# Altium PCB CT310高端控制盒基板电路V1.0.PcbDoc (part 2 of 8)
Units mil, origin at the board's own origin, x right, y up, seen from the top; angles counter-clockwise.
Board outline 8162.61 x 6196.81 mil, 2 copper layers (Top Layer, Bottom Layer), stack 65.792 mil thick; 265 components, 178 nets, 926 pads, 298 vias.
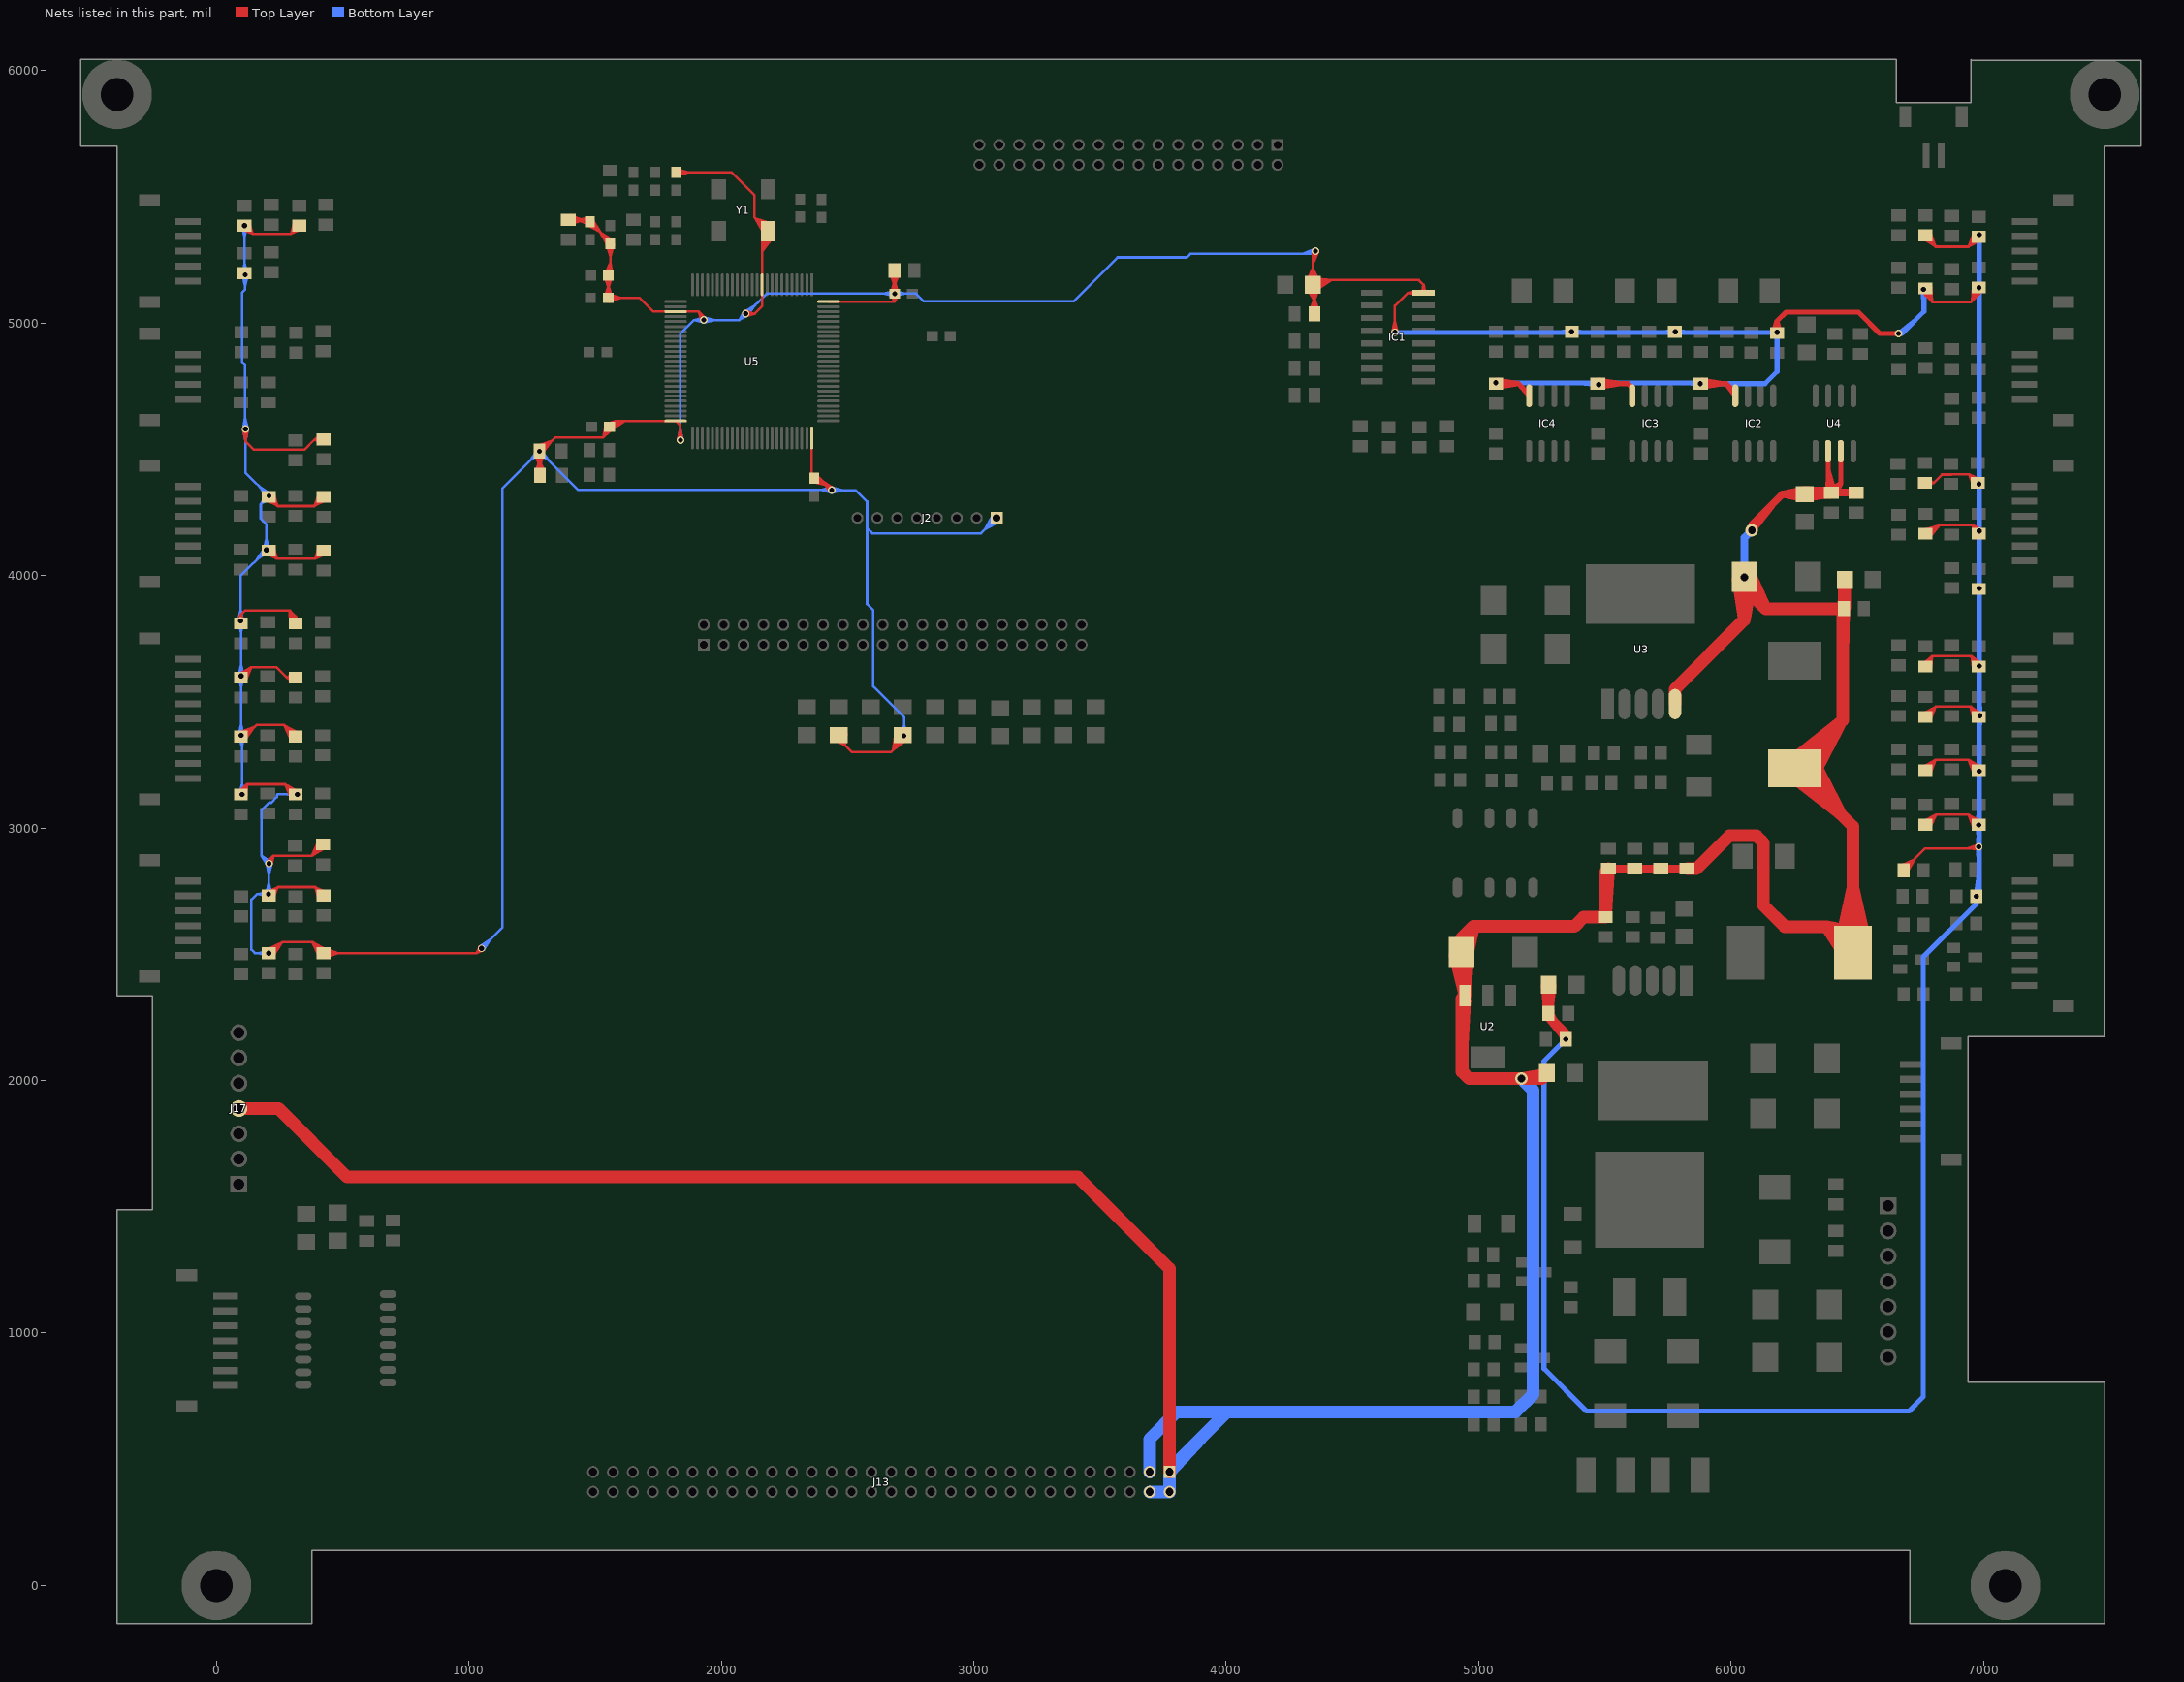
[diagram p2: the nets of this part, all layers, seen from the top]

## Via types
v1: diameter 30, hole 20, Top Layer to Bottom Layer, tented both sides, 226 vias
v2: diameter 60, hole 30, Top Layer to Bottom Layer, tented both sides, 32 vias
v3: diameter 50, hole 30, Top Layer to Bottom Layer, tented both sides, 20 vias
v4: diameter 80, hole 50, Top Layer to Bottom Layer, tented both sides, 10 vias
v5: diameter 50, hole 28, Top Layer to Bottom Layer, tented both sides, 8 vias
v6: diameter 24, hole 16, Top Layer to Bottom Layer, tented both sides, 1 vias
v7: diameter 30, hole 16, Top Layer to Bottom Layer, tented both sides, 1 vias

## Nets (pads, with @x,y where several pads share a name; then routed paths per layer and width w, separated by ;. In a path a pad name is that pad's centre, name@x,y a point inside that pad or via, vN(x,y) a via of type N, cw(c..) or ccw(c..) an arc to the next point about the centre after c; other vN are vias at no path point) (continued)
+3.3V_S: C6.1 C9.2 C92.2 C93.2 C95.2 C96.1 C97.1 C98.1 C100.1 C102.1 C104.1 C108.1 C112.2 C113.2 C114.2 C115.2 D60.1 D61.1 IC1.16 IC2.8 IC3.8 IC4.8 J2.1 L1.1 L4.1 R13.2 R14.2 R15.2 R16.2 R17.2 R23.2 R24.2 R25.2 R26.2 R31.2 R32.2 R33.2 R34.2 R39.2 R40.2 R41.2 R42.2 R45.1 R47.2 R48.2 R49.2 R50.2 R53.1 R55.2 R56.2 R59.2 R60.2 R61.2 R65.2 R66.2 R67.2 R71.2 R72.2 R73.2 R77.2 R78.2 R79.2 R85.2 R86.2 R89.2 R90.2 R93.2 R109.1 R112.1 R115.1 U5.11 U5.28 U5.50 U5.75 U5.100 Y1.4 | length 81028.4
  Top Layer w10: R50.2@88.74,3811.8 97.3,3845.3 ; R34.2@89.74,3610.38 137.85,3636.29 ; R50.2@90.81,3828.55 R50.2@79.36,3815.75 ; R34.2@92.26,3610.19 135.72,3634.57 ; R49.2@92.39,3379.05 151.24,3400.24 ; R49.2@93.08,3375.38 140.2,3396.26 ; R49.2@93.42,3375.56 138.16,3392.99 ; R33.2@93.72,3126.59 R33.2@86.58,3144.16 ; R49.2@93.79,3375.74 139.51,3391.43 ; R33.2@93.9,3137.2 121.22,3173.22 ; R49.2@93.9,3375.79 143.65,3392.65 ; R49.2@93.96,3375.82 142.98,3392.03 ; R34.2@95.31,3601.99 137.85,3636.29 ; R50.2@95.55,3810.01 R50.2@79.36,3815.75 ; R50.2@96.39,3810.01 R50.2@115.23,3815.75 ; R49.2@96.54,3369.9 151.24,3400.24 ; R50.2@97.3,3810.73 97.3,3845.3 ; R50.2@97.3,3820 97.3,3845.3 ; R49.2@98.64,3356.69 R49.2@113.67,3362.67 ; R50.2@100.57,3828.9 R50.2@115.23,3815.75 ; R34.2@100.78,3599.22 137.85,3636.29 ; R33.2@101.23,3132.67 121.22,3173.22 ; R49.2@101.23,3362.67 151.24,3400.24 ; R34.2@101.23,3595.73 137.85,3636.29 ; R33.2@101.88,3122.67 R33.2@119.27,3128.05 ; R49.2@103.35,3375.12 R49.2@113.67,3362.67 ; R49.2@103.73,3358.47 142.98,3392.03 ; R49.2@103.75,3358.49 143.65,3392.65 ; R49.2@103.98,3358.66 139.51,3391.43 ; R77.2@104.18,5371 144.28,5353 ; R49.2@104.32,3358.92 138.16,3392.99 ; R49.2@104.51,3359.08 140.2,3396.26 ; v1@105.06,4578.89 115,4535 v1@124.94,4578.89 ; R34.2@105.2,3595.06 136.42,3634.69 ; R34.2@105.25,3595.11 137.02,3635.84 ; R34.2@105.26,3595.12 135.72,3634.57 ; R33.2@105.42,3141.94 R33.2@86.58,3144.16 ; R50.2@105.85,3811.8 97.3,3845.3 ; R33.2@106.76,3141.27 R33.2@119.27,3128.05 ; R49.2@106.87,3356.15 151.24,3400.24 ; R34.2@108.07,3590.47 137.85,3636.29 ; R33.2@109.29,3129.61 121.22,3173.22 ; R77.2@109.35,5379.68 144.28,5353 ; R49.2@114.51,3349.61 151.24,3400.24 ; v1(115,4580) 115,4533 149.52,4498.48 348.89,4498.48 389.44,4539.04 ; R77.2@115.23,5385.99 144.28,5353 ; R34.2@116.98,3585.79 137.85,3636.29 ; R77.2@122.23,5391.02 144.28,5353 ; R77.2@131.5,5395.06 144.28,5353 ; R61.2@188.93,4096.79 R61.2@200.53,4083.66 ; R61.2@192.27,4092.8 237.81,4067.1 ; R61.2@192.4,4092.72 236.1,4069.19 ; R14.2@197.64,2503.63 R14.2@201.48,2520.01 ; R73.2@198.13,4316.6 R73.2@200.02,4297.04 ; R16.2@200.94,2748.15 243,2766 ; v1@201,2865 226,2890 ; R14.2@201.57,2512.31 246.95,2540.5 ; R14.2@201.87,2512.54 245.67,2537.16 ; R14.2@202.25,2512.79 246.46,2534.98 ; R14.2@202.39,2512.87 248,2535 ; R14.2@202.5,2512.94 249.67,2535.24 ; R61.2@205.02,4108.12 238.09,4068.49 ; R61.2@205.05,4108.09 236.91,4069.37 ; R61.2@205.18,4107.96 237.81,4067.1 ; R61.2@205.15,4107.99 236.1,4069.19 ; R73.2@205.54,4305.49 243,4275 ; R61.2@205.68,4092.36 240.28,4066 ; R16.2@205.89,2739.35 243,2766 ; R14.2@206.33,2511.21 258.88,2545.88 ; R61.2@207.62,4098.67 240.28,4066 ; R73.2@207.62,4310.38 243,4275 ; R61.2@207.9,4099.56 R61.2@200.53,4083.66 ; R16.2@211,2734 243,2766 ; R14.2@211.56,2504.35 258.88,2545.88 ; R16.2@211.56,2732.85 243,2766 ; R61.2@211.55,4098.67 240.28,4066 ; R73.2@211.55,4311.67 243,4275 ; R14.2@214.28,2496.9 249.67,2535.24 ; R14.2@214.42,2497.02 248,2535 ; R14.2@214.57,2497.17 246.46,2534.98 ; R14.2@214.87,2497.47 245.67,2537.16 ; R14.2@215.05,2497.65 246.95,2540.5 ; R14.2@215.42,2510.6 R14.2@201.48,2520.01 ; R73.2@215.8,4308.75 R73.2@200.02,4297.04 ; R73.2@216.1,4320.87 242.27,4276.24 ; R73.2@216.14,4320.8 240.91,4277.44 ; R73.2@216.11,4320.85 243,4275 ; R73.2@216.17,4320.77 240.88,4277.12 ; R73.2@216.16,4320.77 241.62,4276.12 ; R14.2@217.35,2504.35 261,2548 380.62,2548 ; R14.2@217.67,2498.28 258.88,2545.88 ; R16.2@218.34,2727.53 243,2766 ; v1@218.36,2855.48 226,2890 ; R61.2@218.56,4103.69 240.28,4066 ; R73.2@218.57,4316.67 243,4275 ; R14.2@225.77,2492.32 258.88,2545.88 ; R16.2@227.39,2723.06 243,2766 ; R73.2@227.76,4320.84 243,4275 ; R61.2@227.85,4107.69 240.28,4066 ; 279.04,4066 240.28,4066 ; 279.06,4065.98 391.58,4065.98 ; R42.2@291.76,3806.99 290,3862 ; R25.2@294.26,3122.72 273.38,3173.22 ; R41.2@294.48,3352.37 269.11,3407.5 ; R42.2@301.75,3808.23 290,3862 ; R41.2@303.24,3357.32 269.11,3407.5 ; R26.2@304.39,3577.97 279.12,3595.73 ; R26.2@304.39,3613.48 279.12,3595.73 ; R71.2@307.74,5395.06 294.95,5353 ; R26.2@308.8,3587.19 279.12,3595.73 ; R26.2@308.8,3604.27 279.12,3595.73 ; R25.2@310.01,3132.67 273.38,3173.22 ; R41.2@310.01,3362.67 269.11,3407.5 ; R26.2@310.01,3595.73 279.12,3595.73 ; R42.2@310.01,3810.73 290,3862 ; R25.2@313.62,3126.25 281.36,3168.93 ; R25.2@313.77,3126.09 283.23,3165.29 ; R25.2@313.94,3132.67 273.38,3173.22 ; R41.2@313.94,3362.67 268.61,3408 159,3408 R49.2@113.67,3362.67 ; R26.2@313.94,3595.73 279.12,3595.73 ; R25.2@313.96,3125.9 281.95,3164.65 ; R25.2@314.04,3125.82 280.78,3165.03 ; R25.2@314.18,3125.68 277.84,3166.37 ; R25.2@315.56,3141.39 R25.2@303.17,3127.41 ; R25.2@315.93,3138.93 273.38,3173.22 ; R41.2@315.95,3368.91 269.11,3407.5 ; R71.2@317.01,5391.02 294.95,5353 ; R42.2@317.77,3814.48 290,3862 ; R25.2@321.33,3123.01 R25.2@303.17,3127.41 ; R25.2@321.5,3147.32 273.38,3173.22 ; R41.2@321.67,3377.18 269.11,3407.5 ; R71.2@324,5385.99 294.95,5353 ; R42.2@325.96,3820.34 290,3862 ; R25.2@326.37,3141.44 277.84,3166.37 ; R25.2@326.44,3141.39 280.78,3165.03 ; R25.2@326.49,3141.36 281.95,3164.65 ; R25.2@326.7,3141.22 283.23,3165.29 ; R25.2@326.99,3141 281.36,3168.93 ; R71.2@327.94,5385.99 294.95,5353 ; R71.2@329.88,5379.68 294.95,5353 ; R71.2@335.05,5371 294.95,5353 ; R17.2@402.8,2944.87 377.66,2890 ; R56.2@404.04,4107.69 391.58,4065.98 ; R15.2@404.08,2723.76 391.12,2766 ; R67.2@404.34,4321.21 387.6,4275 ; R13.2@404.75,2494.15 380.62,2548 ; R17.2@411.56,2939.94 377.66,2890 ; R15.2@413.33,2727.81 391.12,2766 ; R56.2@413.32,4103.69 391.58,4065.98 ; R67.2@413.41,4316.82 387.6,4275 ; R13.2@413.54,2499.03 380.62,2548 ; R79.2@414.71,4521.28 389.44,4539.04 ; R79.2@414.71,4556.79 389.44,4539.04 ; R17.2@418.33,2934.6 377.66,2890 ; R79.2@419.12,4530.5 389.44,4539.04 ; R79.2@419.12,4547.57 389.44,4539.04 ; R13.2@420.33,2504.35 380.62,2548 ; R15.2@420.33,2732.85 391.12,2766 ; R56.2@420.33,4098.67 391.58,4065.98 ; R67.2@420.33,4311.67 387.6,4275 ; R79.2@420.33,4539.04 389.44,4539.04 ; R17.2@422.26,2934.6 377.66,2890 ; R15.2@424.26,2732.85 391.12,2766 ; R17.2@424.27,2928.35 377.66,2890 ; R56.2@424.26,4098.67 391.58,4065.98 ; R67.2@424.26,4311.67 387.6,4275 ; R79.2@424.26,4539.04 389.44,4539.04 ; R15.2@426.21,2739.16 391.12,2766 ; R56.2@426.21,4092.36 391.58,4065.98 ; R67.2@426.23,4305.38 387.6,4275 ; R13.2@426.26,2510.6 380.62,2548 ; R13.2@428.2,2504.35 481.82,2504.35 ; R13.2@428.9,2495.76 481.82,2504.35 ; R13.2@428.9,2512.95 481.82,2504.35 ; R17.2@429.99,2920.08 377.66,2890 ; R15.2@431.39,2747.83 391.12,2766 ; R56.2@431.36,4083.66 391.58,4065.98 ; R13.2@431.44,2486.01 481.82,2504.35 ; R13.2@431.44,2522.69 481.82,2504.35 ; R67.2@431.62,4296.86 387.6,4275 ; R13.2@431.95,2518.9 380.62,2548 ; v1@1041.72,2528.6 1031.35,2504.35 ; v1(1050,2523) 1031.35,2504.35 ; v1@1055.6,2514.72 1031.35,2504.35 ; D60.1@1261.65,4483.16 1279.99,4432.77 ; D61.1@1263.51,4405.15 1279.99,4456.25 ; D60.1@1270.01,4491.64 1278.13,4444.22 ; D60.1@1270.09,4490.87 1281.85,4444.22 ; D60.1@1271.39,4485.7 1279.99,4432.77 ; D60.1@1271.55,4514.8 1327,4532.54 ; D61.1@1273.34,4402.97 1279.99,4456.25 ; D60.1@1273.93,4500.25 1319.33,4528.52 ; D60.1@1274.13,4500.4 1317.56,4525.64 ; D60.1@1274.56,4500.69 1321.87,4525.34 ; D60.1@1275.43,4505.52 1327,4532.54 ; D60.1@1279.99,4486.39 1279.99,4432.77 ; D60.1@1279.99,4498.2 1327,4532.54 ; D61.1@1281.95,4396.69 1279.99,4398.65 v1(1279.99,4492.29) ; D61.1@1281.95,4402.6 1279.99,4456.25 ; D60.1@1285.57,4491.63 1327,4532.54 ; D60.1@1286.89,4485.06 1321.87,4525.34 ; D60.1@1287.09,4485.25 1319.04,4524.58 ; D60.1@1287.1,4485.26 1318.63,4524.28 ; D60.1@1287.34,4485.51 1317.56,4525.64 ; D60.1@1287.42,4485.6 1319.33,4528.52 ; D60.1@1288.58,4485.7 1279.99,4432.77 ; D60.1@1289.89,4490.87 1278.13,4444.22 ; D60.1@1289.97,4491.64 1281.85,4444.22 ; D61.1@1290.51,4403.6 1279.99,4456.25 ; D60.1@1293.24,4485.11 1327,4532.54 ; D60.1@1298.33,4483.16 1279.99,4432.77 ; D61.1@1300.16,4406.49 1279.99,4456.25 ; C95.2@1393.3,5408.67 1471.42,5408.67 C92.2@1479.3,5400.79 1560.29,5319.79 L4.1@1560.29,5315.18 1560.29,5195.86 C97.1@1552.73,5188.3 1552.73,5099.39 C104.1@1552.63,5099.29 ; C95.2@1399.2,5408.67 1452.82,5408.67 ; C95.2@1399.89,5400.07 1452.82,5408.67 ; C95.2@1399.89,5417.26 1452.82,5408.67 ; C95.2@1402.43,5390.33 1452.82,5408.67 ; C95.2@1402.43,5427 1452.82,5408.67 ; C92.2@1470.64,5386.96 1520.19,5359.89 ; C92.2@1475.55,5388.56 1428.14,5408.67 ; C92.2@1478.88,5417.44 1428.14,5408.67 ; C92.2@1479.3,5398.82 1520.19,5359.89 ; C92.2@1479.3,5402.76 1428.14,5408.67 ; C92.2@1490.72,5408.05 1520.19,5359.89 ; C104.1@1538.11,5101.49 1552.73,5148.98 ; C97.1@1538.2,5186.13 1552.73,5138.61 C97.1@1567.25,5186.13 ; C97.1@1540.47,5191.95 1560.29,5239.56 ; C102.1@1541.88,4594.34 1532,4546 ; L4.1@1545.77,5311.04 1560.29,5263.52 ; L4.1@1548.38,5308.56 1521.06,5359.03 ; C104.1@1554.6,5099.29 1604.29,5099.29 ; C97.1@1554.7,5188.3 1560.29,5239.56 ; C102.1@1555.67,4589.29 1532,4546 ; C102.1@1555.89,4603.5 1617.72,4612.07 ; C104.1@1556.77,5084.77 1604.29,5099.29 ; C104.1@1556.77,5113.82 1604.29,5099.29 ; L4.1@1560.29,5313.21 1560.29,5263.52 ; L4.1@1560.29,5317.14 1521.06,5359.03 ; C102.1@1566.53,4576.35 1617.72,4612.07 ; C104.1@1567.16,5101.44 1552.73,5148.98 ; C102.1@1567.36,4580.41 1532,4546 ; C97.1@1569.37,5188.8 1560.29,5239.56 ; L4.1@1569.64,5328.47 1521.06,5359.03 ; L4.1@1574.82,5311.04 1560.29,5263.52 ; 1744.15,4612.07 U5.50@1779.9,4612.07 ; 1744.15,5045.14 U5.28@1779.9,5045.14 ; U5.28@1819.3,5045.3 ccw(c1819.3,5045.14) U5.28@1819.15,5045.14 ; C93.2@1821.29,5596.73 2041.27,5596.73 2131,5507 2131,5418.34 Y1.4@2185.72,5363.62 2161.67,5339.56 U5.11@2161.67,5151.44 2161.67,5066.67 2132,5037 ; C93.2@1823.46,5582.2 1870.98,5596.73 C93.2@1823.46,5611.25 ; v1@1828.06,4537.11 1838,4581 v1@1847.94,4537.11 ; v1(1838,4536) 1838,4593.22 U5.50@1819.15,4612.07 1580.41,4612.07 ; U5.28@1858.4,5045.14 1894.15,5046.08 ; v1@1921.91,5007.84 1909.92,5046.08 ; v1@1938.78,5018.28 1909.92,5046.08 ; v1(2097,5037) 2132,5037 ; v1@2098.43,5027.1 2132,5037 ; v1@2098.43,5046.9 2132,5037 ; Y1.4@2161.53,5357.84 2161.67,5284.7 ; 2161.67,5076.44 U5.11@2161.67,5112.19 ; U5.11@2161.67,5190.69 2161.67,5226.44 ; Y1.4@2167.01,5357.6 2134.98,5414.36 ; Y1.4@2171.59,5357.17 2161.67,5284.7 ; Y1.4@2175.4,5363.24 2134.98,5414.36 ; Y1.4@2185.72,5353.78 2161.67,5284.7 ; Y1.4@2185.72,5373.46 2134.98,5414.36 ; Y1.4@2193.52,5385.72 2134.98,5414.36 ; Y1.4@2197.24,5395.11 2134.98,5414.36 ; Y1.4@2198.9,5347.66 2161.67,5284.7 ; Y1.4@2207.2,5341.94 2161.67,5284.7 ; 2358.52,4470.15 U5.75@2358.52,4505.9 ; U5.75@2358.52,4545.15 2358.52,4394.92 C100.1@2368,4385.43 ; C100.1@2362.97,4369.67 2418.89,4357.11 ; C100.1@2368,4383.46 2418.89,4357.11 ; C100.1@2376.37,4395.53 2418.89,4357.11 ; U5.100@2425.44,5084.51 2686.77,5084.51 ; v1@2430.27,4331.65 2401.79,4374.21 ; v1@2444.35,4345.73 2401.79,4374.21 ; R45.1@2450.43,3349.29 2489.97,3328.03 ; R45.1@2456.31,3357.73 2489.97,3328.03 ; R45.1@2463.77,3364.48 2489.97,3328.03 ; U5.100@2464.69,5084.51 2500.44,5084.51 ; R45.1@2469.31,3367.88 2489.97,3328.03 ; R45.1@2475.28,3370.45 2489.97,3328.03 ; R45.1@2485.1,3372.65 2489.97,3328.03 ; R45.1@2489.97,3367.88 2489.97,3328.03 ; R45.1@2495.39,3372.59 2489.97,3328.03 ; C96.1@2668.3,5198.81 2686.77,5148.47 ; C98.1@2672.24,5118.46 2686.77,5165.98 C98.1@2701.29,5118.46 ; C98.1@2672.48,5112.9 2686.77,5084.51 ; C98.1@2676.82,5117.29 2686.68,5165.69 ; C98.1@2676.82,5117.32 2686.86,5165.69 ; C98.1@2676.83,5117.41 2686.77,5161.29 C98.1@2696.71,5117.41 ; C96.1@2678.04,5201.38 2686.77,5148.47 ; C96.1@2686.63,5202.09 2686.77,5148.47 ; C96.1@2686.77,5203 v1(2686.77,5116.29) ; R53.1@2690.59,3376.65 2680.84,3308.84 ; C96.1@2695.22,5201.42 2686.77,5148.47 ; C98.1@2696.72,5117.29 2686.86,5165.69 ; C98.1@2696.72,5117.32 2686.68,5165.69 ; R53.1@2700.47,3374.48 2680.84,3308.84 ; C98.1@2701.06,5112.9 2686.77,5084.51 ; C96.1@2704.98,5198.91 2686.77,5148.47 ; R53.1@2709.84,3370.91 2680.84,3308.84 ; R53.1@2715.16,3369.67 2693.9,3318.76 ; R53.1@2715.59,3367.88 2680.84,3308.84 ; R53.1@2715.56,3370.36 2693.64,3326.51 ; R53.1@2715.78,3370.69 2691.17,3326.38 ; R53.1@2715.96,3370.95 2688.77,3325.8 ; R53.1@2719.53,3367.88 R53.1@2719.53,3347.53 ; R53.1@2721.03,3364.33 2680.84,3308.84 ; R53.1@2728.7,3357.86 2680.84,3308.84 ; R53.1@2730.77,3357.64 2688.77,3325.8 ; R53.1@2730.94,3357.8 2691.17,3326.38 ; R53.1@2731.18,3358.04 2693.64,3326.51 ; R53.1@2731.61,3358.51 2695.15,3323.49 ; R53.1@2731.63,3358.54 2694.89,3322.89 ; R53.1@2731.85,3358.81 2693.9,3318.76 ; R53.1@2735.4,3350.28 2680.84,3308.84 ; C112.2@4317.54,5161.94 4343.41,5217.73 ; C112.2@4318.18,5140.26 4349.32,5086.58 ; C112.2@4327.07,5158.44 4343.41,5217.73 ; C112.2@4327.35,5144.62 4349.32,5086.58 ; C108.1@4330.98,5046.03 4349.32,5096.42 ; C112.2@4336.93,5156.58 4343.41,5217.73 ; C112.2@4336.99,5147.4 4349.32,5086.58 ; C108.1@4340.72,5043.49 4349.32,5096.42 ; C112.2@4341.3,5168.66 4418.33,5170.3 ; C112.2@4341.75,5178.74 4418.33,5170.3 ; C112.2@4342.16,5158.67 4418.33,5170.3 ; C112.2@4343.41,5148.36 4349.32,5086.58 ; C112.2@4343.41,5156.23 4343.41,5217.73 ; v1@4344.06,5286.08 4343.41,5234.04 ; C112.2@4345.2,5146.05 4418.33,5170.3 ; C112.2@4348.96,5136.76 4418.33,5170.3 ; C108.1@4349.32,5036.89 4349.32,5146.39 C112.2@4343.41,5152.3 ; C108.1@4349.32,5042.8 4349.32,5096.42 ; C112.2@4349.9,5148.64 4349.32,5086.58 ; C112.2@4349.9,5156.58 4343.41,5217.73 ; C112.2@4353.94,5127.98 4418.33,5170.3 ; C108.1@4357.91,5043.49 4349.32,5096.42 ; C112.2@4359.76,5158.44 4343.41,5217.73 ; C112.2@4359.9,5147.73 4349.32,5086.58 ; v1@4363.55,5282.04 4343.41,5234.04 ; C108.1@4367.66,5046.03 4349.32,5096.42 ; C112.2@4369.29,5161.94 4343.41,5217.73 ; C112.2@4369.72,5145.19 4349.32,5086.58 ; v1@4658.06,4964.11 4668,5008 v1@4677.94,4964.11 ; v1(4668,4963) 4668,5068 4719.3,5119.3 ; IC1.16@4749.41,5112.53 4719.3,5119.3 ; IC1.16@4749.41,5126.07 4719.3,5119.3 ; IC1.16@4750.16,5119.3 4719.3,5119.3 ; IC1.16@4774.89,5120.03 4781.66,5150.93 ; IC1.16@4788.43,5120.03 4781.66,5150.93 ; R86.2@6672.63,2851.75 6727.76,2877.13 ; R86.2@6677.58,2843 6727.76,2877.13 ; R86.2@6682.93,2832.29 6769.63,2919 v1@6971,2919 ; R86.2@6682.93,2836.23 6727.76,2877.13 ; R86.2@6689.17,2830.29 6727.76,2877.13 ; R86.2@6697.44,2824.56 6727.76,2877.13 ; R65.2@6752.83,5130.41 6770.28,5110.32 ; R65.2@6754.31,5126.61 6789.55,5092 ; R65.2@6754.59,5126.29 6790.85,5093.71 ; R65.2@6754.7,5126.17 6793.58,5091.93 ; R65.2@6758.5,5126.93 6797.3,5083.3 ; R23.2@6759.82,3651.75 6795.48,3680.48 ; R65.2@6761.77,5135.53 6770.28,5110.32 ; R93.2@6761.82,5333.02 6810.3,5302.3 ; R24.2@6762.72,3243.58 6810.83,3269.48 ; R39.2@6762.72,3454.58 6810.83,3480.48 ; R40.2@6762.99,3027.79 6812.48,3053.48 ; R65.2@6763.49,5142.89 R65.2@6778.78,5135.53 ; R66.2@6766.18,4182.23 6825.05,4200.05 ; R65.2@6766.34,5123.99 R65.2@6778.78,5135.53 ; R65.2@6766.57,5132.94 6797.3,5083.3 ; R23.2@6766.99,3644.63 6795.48,3680.48 ; R55.2@6767.27,4367.3 6802.72,4367.3 ; R93.2@6767.93,5341.02 6810.3,5302.3 ; R24.2@6768.29,3235.19 6810.83,3269.48 ; R39.2@6768.29,3446.19 6810.83,3480.48 ; R40.2@6768.42,3019.31 6812.48,3053.48 ; R66.2@6769.87,4172.87 6825.05,4200.05 ; R40.2@6770.28,3012.93 6771.93,3012.93 6812.48,3053.48 ; R24.2@6770.28,3228.93 6810.83,3269.48 ; R39.2@6770.28,3439.93 6810.83,3480.48 ; R23.2@6770.3,3655.3 6795.48,3680.48 ; R66.2@6770.27,4165.43 6790.43,4165.43 6825.3,4200.3 6958.7,4200.3 ; R65.2@6770.28,5136.93 6770.28,5110.32 ; R93.2@6770.27,5346.93 6770.27,5342.32 6810.3,5302.3 ; R65.2@6770.48,5138.3 6793.58,5091.93 ; R65.2@6770.63,5138.06 6790.85,5093.71 ; R65.2@6770.82,5137.71 6789.55,5092 ; R55.2@6771.21,4367.3 6802.72,4367.3 ; R55.2@6772.39,4358.75 6802.72,4367.3 ; R55.2@6772.39,4375.84 6802.72,4367.3 ; R40.2@6774.21,3012.93 6812.48,3053.48 ; R24.2@6774.21,3228.93 6810.83,3269.48 ; R39.2@6774.21,3439.93 6810.83,3480.48 ; R23.2@6774.21,3639.93 6795.48,3680.48 ; R66.2@6774.21,4165.43 6825.05,4200.05 ; R65.2@6774.21,5136.93 6797.3,5083.3 ; R93.2@6774.21,5346.93 6810.3,5302.3 ; R55.2@6776.71,4349.51 6802.72,4367.3 ; R55.2@6776.71,4385.09 6802.72,4367.3 ; R66.2@6779.55,4158.66 6825.05,4200.05 ; R40.2@6780.92,3007.51 6812.48,3053.48 ; R24.2@6781.05,3223.67 6810.83,3269.48 ; R39.2@6781.05,3434.67 6810.83,3480.48 ; R93.2@6781.3,5351.83 6810.3,5302.3 ; R23.2@6782.19,3636.66 6795.48,3680.48 ; R65.2@6782.36,5139.74 6797.3,5083.3 ; R66.2@6786.9,4151.8 6825.05,4200.05 ; R65.2@6787.72,5130.41 6770.28,5110.32 ; R40.2@6789.7,3002.59 6812.48,3053.48 ; R24.2@6789.96,3218.98 6810.83,3269.48 ; R39.2@6789.96,3429.98 6810.83,3480.48 ; R93.2@6790.4,5356.13 6810.3,5302.3 ; R23.2@6792.12,3634.81 6795.48,3680.48 ; R65.2@6792.27,5141.47 6797.3,5083.3 ; R60.2@6957.17,4358.08 6943.3,4401.3 ; R72.2@6958.22,4161.21 6958.7,4200.3 ; R59.2@6958.24,5145.21 6953.74,5085.74 ; R31.2@6958.81,3633.71 6952.11,3680.48 ; R47.2@6959.21,3432.67 6949.11,3480.48 ; R32.2@6960.4,3219.33 6941.11,3269.48 ; R48.2@6960.54,3003.09 6940.93,3052.3 ; R89.2@6960.56,5351.78 6940.66,5302.3 ; R59.2@6968.17,5143.61 6953.74,5085.74 ; R72.2@6968.28,4162.4 6958.7,4200.3 ; R31.2@6968.59,3636.19 6952.11,3680.48 ; R32.2@6969.42,3223.81 6941.11,3269.48 ; R48.2@6969.5,3007.7 6940.93,3052.3 ; R89.2@6969.51,5347.16 6940.66,5302.3 ; R59.2@6972.56,5143.3 6960.52,5093.75 ; R59.2@6972.63,5143.51 6960.87,5097.81 ; R59.2@6972.79,5143.9 6958.88,5098.3 ; R59.2@6972.9,5144.16 6956.18,5095.52 ; R48.2@6973.19,3005.75 6944.82,3049.18 ; R48.2@6973.21,3005.72 6942.97,3051.22 ; R48.2@6973.29,3005.63 6944.63,3048.18 ; R48.2@6973.25,3005.68 6944.94,3048.28 ; R48.2@6973.37,3005.54 6942.74,3049.46 ; R60.2@6973.36,4367.3 6943.3,4401.3 ; R48.2@6973.4,3018.5 R48.2@6987.8,3027.62 ; R60.2@6974.19,4355.75 6945.59,4399.53 ; R60.2@6974.22,4355.72 6946.19,4398.4 ; R60.2@6974.25,4355.68 6945.88,4398.37 ; R60.2@6974.3,4355.62 6944.26,4399.66 ; R32.2@6974.4,3230.1 R32.2@6988.08,3243.39 ; R31.2@6974.55,3635.66 6952.18,3680.41 ; R31.2@6974.53,3635.68 6952.73,3679.78 ; R89.2@6974.73,5355.63 6949.03,5309.01 ; R89.2@6974.81,5355.73 6950.12,5311.76 ; R89.2@6974.88,5355.84 6949.85,5312.49 ; R32.2@6974.92,3219.11 6946.57,3266.45 ; R32.2@6974.96,3219.05 6948.29,3263.5 ; R32.2@6975.04,3218.94 6948.45,3262.14 ; R32.2@6975.13,3218.83 6947.91,3261.66 ; R89.2@6975.12,5356.16 6946.71,5311.69 ; R32.2@6975.29,3218.63 6945.08,3263.08 ; R32.2@6975.3,3235.3 6941.11,3269.48 ; R48.2@6976.36,3012.92 6940.93,3052.3 ; R32.2@6976.36,3228.93 6941.11,3269.48 ; R47.2@6976.36,3439.92 6949.11,3480.48 ; R31.2@6976.36,3639.93 6952.11,3680.48 ; R72.2@6976.36,4165.43 6958.7,4200.3 ; R59.2@6976.36,5140.93 6953.74,5085.74 ; R89.2@6976.36,5341.93 6940.66,5302.3 ; R60.2@6977.3,4367.3 6943.3,4401.3 ; R60.2@6978.66,4352.57 R60.2@6966.39,4362.22 ; v1@6978.72,2934.74 6933.51,2919 ; R60.2@6978.93,4371.52 R60.2@6966.39,4362.22 ; R47.2@6979.17,3452.3 R47.2@6968.81,3435.77 ; R60.2@6979.25,4373.59 6943.3,4401.3 ; R48.2@6980.3,3012.92 6940.93,3052.3 ; R47.2@6980.3,3449.3 6949.11,3480.48 ; R31.2@6980.3,3652.3 6952.11,3680.48 ; R89.2@6980.29,5341.93 6940.66,5302.3 ; v1(6981,2925) 6933.51,2919 ; v1@6981.21,2915 6933.51,2919 ; R48.2@6982.28,3019.19 6940.93,3052.3 ; R89.2@6982.28,5335.66 6940.66,5302.3 ; R32.2@6982.39,3235.09 6941.11,3269.48 ; R47.2@6983.06,3445.35 6949.11,3480.48 ; R31.2@6983.32,3645.01 6952.11,3680.48 ; R72.2@6983.57,4170.14 6958.7,4200.3 ; R59.2@6984.08,5137.09 6953.74,5085.74 ; R60.2@6984.48,4382.23 6943.3,4401.3 ; R48.2@6987.3,3019.77 6942.74,3049.46 ; R48.2@6987.33,3019.74 6944.63,3048.18 ; R48.2@6987.37,3019.71 6944.94,3048.28 ; R48.2@6987.46,3019.63 6944.82,3049.18 ; R48.2@6987.51,3019.59 6942.97,3051.22 ; R89.2@6987.81,5327.24 6940.66,5302.3 ; R47.2@6988.32,3435.27 R47.2@6968.81,3435.77 ; R60.2@6988.41,4369.68 6946.19,4398.4 ; R60.2@6988.48,4369.62 6945.59,4399.53 ; R32.2@6989.4,3232.69 6945.08,3263.08 ; R32.2@6989.51,3232.59 6947.91,3261.66 ; R47.2@6989.55,3453.06 6949.11,3480.48 ; R89.2@6989.57,5342.47 6946.71,5311.69 ; R32.2@6989.61,3232.5 6948.45,3262.14 ; R32.2@6989.75,3232.38 6948.29,3263.5 ; R89.2@6989.79,5342.66 6949.85,5312.49 ; R32.2@6989.88,3232.25 6946.57,3266.45 ; R89.2@6989.9,5342.76 6950.12,5311.76 ; R89.2@6990.07,5342.92 6949.03,5309.01 ; R31.2@6990.14,3652.44 6952.11,3680.48 ; R59.2@6990.12,5134.16 6956.18,5095.52 ; R59.2@6990.19,5134.26 6958.88,5098.3 ; R31.2@6990.21,3647.93 6952.31,3680.15 ; R59.2@6990.42,5134.6 6960.87,5097.81 ; R72.2@6990.49,4177.55 6958.7,4200.3 ; R59.2@6990.61,5134.92 6960.52,5093.75 ; R48.2@6990.94,3010.88 R48.2@6987.8,3027.62 ; R59.2@6992.28,5131.26 6953.74,5085.74 ; R32.2@6993,3224.95 R32.2@6988.08,3243.39 ; R50.2@79.36,3815.75 v1(96,3820) ; R50.2@79.36,3815.75 97.3,3845.3 ; R50.2@86.31,3822.47 97.3,3845.3 ; R50.2@86.31,3822.47 97.3,3845.3 ; R50.2@86.31,3822.47 97.3,3845.3 ; R50.2@86.31,3822.47 97.3,3845.3 ; R50.2@86.31,3822.47 97.3,3845.3 ; R50.2@86.31,3822.47 97.3,3845.3 ; R33.2@86.58,3144.16 v1(101.67,3132.67) ; R33.2@86.58,3144.16 121.22,3173.22 ; R33.2@93.2,3137.98 121.22,3173.22 ; R33.2@93.2,3137.98 121.22,3173.22 ; R33.2@93.2,3137.98 121.22,3173.22 ; R33.2@93.2,3137.98 121.22,3173.22 ; R33.2@93.2,3137.98 121.22,3173.22 ; R33.2@93.2,3137.98 121.22,3173.22 ; v1(96,3820) 97.3,3845.3 ; v1(96,3820) 97.3,3845.3 ; v1(96,3820) 97.3,3845.3 ; v1(96,3820) 97.3,3845.3 ; v1(96,3820) R50.2@115.23,3815.75 ; v1(96,3820) 97.3,3845.3 ; v1(96,3820) 97.3,3845.3 ; R33.2@97.3,3149.3 v1(101.67,3132.67) ; R33.2@97.3,3149.3 110.18,3137.91 R33.2@97.3,3149.3 ; R33.2@97.3,3149.3 91.67,3133.05 R33.2@97.3,3149.3 ; R33.2@97.3,3149.3 v1(101.67,3132.67) ; R33.2@97.3,3149.3 121.22,3173.22 ; R33.2@97.3,3149.3 R33.2@97.3,3132.67 v1(101.67,3132.67) ; 97.3,3845.3 R50.2@105.89,3821.47 ; 97.3,3845.3 R50.2@105.89,3821.47 ; 97.3,3845.3 R50.2@105.89,3821.47 ; 97.3,3845.3 R50.2@105.89,3821.47 ; 97.3,3845.3 R50.2@105.89,3821.47 ; 97.3,3845.3 R50.2@105.89,3821.47 ; 97.3,3845.3 R50.2@115.23,3815.75 ; 97.3,3845.3 114,3862 290,3862 ; v1(98,3366.67) 139.51,3391.43 ; v1(98,3366.67) 138.16,3392.99 ; v1(98,3366.67) 140.2,3396.26 ; v1(98,3366.67) 142.98,3392.03 ; v1(98,3366.67) R49.2@113.67,3362.67 ; v1(98,3366.67) 143.65,3392.65 ; v1(98,3602) 136.42,3634.69 ; v1(98,3602) 135.72,3634.57 ; v1(98,3602) 136.06,3634.49 ; v1(98,3602) 137.02,3635.84 ; v1(98,3602) 137.85,3636.29 ; v1(101.67,3132.67) 121.22,3173.22 ; v1(101.67,3132.67) 121.22,3173.22 ; v1(101.67,3132.67) 121.22,3173.22 ; v1(101.67,3132.67) 121.22,3173.22 ; v1(101.67,3132.67) 121.22,3173.22 ; v1(101.67,3132.67) R33.2@119.27,3128.05 ; v1(101.67,3132.67) 121.22,3173.22 ; R77.2@105.02,5378.2 144.28,5353 ; R77.2@105.02,5378.2 144.28,5353 ; R77.2@105.02,5378.2 144.28,5353 ; R77.2@105.02,5378.2 144.28,5353 ; R77.2@105.02,5378.2 144.28,5353 ; R33.2@111.1,3129.35 121.22,3173.22 ; R33.2@111.1,3129.35 121.22,3173.22 ; R33.2@111.1,3129.35 121.22,3173.22 ; R33.2@111.1,3129.35 121.22,3173.22 ; R33.2@111.1,3129.35 121.22,3173.22 ; R33.2@111.1,3129.35 121.22,3173.22 ; v1(111.29,5385.99) 144.28,5353 ; v1(111.29,5385.99) 144.28,5353 ; v1(111.29,5385.99) 144.28,5353 ; v1(111.29,5385.99) 144.28,5353 ; v1(111.29,5385.99) 144.28,5353 ; R77.2@119.08,5392.26 144.28,5353 ; R77.2@119.08,5392.26 144.28,5353 ; R77.2@119.08,5392.26 144.28,5353 ; R77.2@119.08,5392.26 144.28,5353 ; R77.2@119.08,5392.26 144.28,5353 ; R33.2@119.27,3128.05 121.22,3173.22 ; 121.22,3173.22 273.38,3173.22 ; 136.06,3634.49 105.22,3595.08 137.85,3636.29 ; 136.06,3634.49 92.3,3610.22 136.42,3634.69 ; 137.02,3635.84 92.21,3610.15 137.85,3636.29 ; 137.85,3636.29 238.56,3636.29 279.12,3595.73 ; 144.28,5353 294.95,5353 ; v1(198,4101) 238.09,4068.49 ; v1(198,4101) 236.1,4069.19 ; v1(198,4101) R61.2@200.53,4083.66 ; v1(198,4101) 237.81,4067.1 ; v1(198,4101) 236.91,4069.37 ; R73.2@200.02,4297.04 v1(208,4315) ; R73.2@200.02,4297.04 243,4275 ; R61.2@200.53,4083.66 240.28,4066 ; R73.2@201.11,4307.75 241.62,4276.12 ; R73.2@201.13,4307.74 243,4275 ; R73.2@201.14,4307.72 240.88,4277.12 ; R14.2@201.48,2520.01 v1(207.62,2504.35) ; R14.2@201.48,2520.01 258.88,2545.88 ; R16.2@201.76,2746.52 243,2766 ; R16.2@201.76,2746.52 243,2766 ; R16.2@201.76,2746.52 243,2766 ; R16.2@201.76,2746.52 243,2766 ; R16.2@201.76,2746.52 243,2766 ; v1(207,2738) 243,2766 ; v1(207,2738) 243,2766 ; v1(207,2738) 243,2766 ; v1(207,2738) 243,2766 ; v1(207,2738) 243,2766 ; v1(207.62,2504.35) 246.46,2534.98 ; v1(207.62,2504.35) 249.67,2535.24 ; v1(207.62,2504.35) 245.67,2537.16 ; v1(207.62,2504.35) 246.95,2540.5 ; v1(207.62,2504.35) 248,2535 ; v1(208,4315) 242.27,4276.24 ; v1(208,4315) 240.91,4277.44 ; v1(208,4315) 241.62,4276.12 ; v1(208,4315) 243,4275 ; v1(208,4315) 240.88,4277.12 ; v1(209,2859) 211,2875 ; v1(209,2859) 226,2890 ; v1(209,2859) 211,2875 ; v1(209,2859) 211,2861 211,2875 ; 211,2875 218.82,2860.9 211,2875 ; 211,2875 199.95,2863.26 211,2875 ; 211,2875 226,2890 ; R16.2@213.97,2730.83 243,2766 ; R16.2@213.97,2730.83 243,2766 ; R16.2@213.97,2730.83 243,2766 ; R16.2@213.97,2730.83 243,2766 ; R16.2@213.97,2730.83 243,2766 ; 226,2890 377.66,2890 ; 236.91,4069.37 192.5,4092.65 238.09,4068.49 ; 240.91,4277.44 201.18,4307.69 242.27,4276.24 ; 243,2766 391.12,2766 ; 243,4275 387.6,4275 ; 273.38,3173.22 R25.2@303.17,3127.41 ; 277.84,3166.37 v1(321,3133) ; 280.78,3165.03 v1(321,3133) ; 281.36,3168.93 v1(321,3133) ; 281.95,3164.65 v1(321,3133) ; 283.23,3165.29 v1(321,3133) ; 290,3862 313.94,3838.06 ; R25.2@303.17,3127.41 v1(321,3133) ; 313.94,3838.06 R42.2@313.94,3810.73 313.94,3838.06 ; 313.94,3838.06 322.46,3812.09 313.94,3838.06 ; 313.94,3838.06 305.43,3812.09 313.94,3838.06 ; 313.94,3838.06 331.45,3817.07 313.94,3838.06 ; 313.94,3838.06 296.43,3817.07 313.94,3838.06 ; 380.62,2548 R13.2@424.26,2504.35 1031.35,2504.35 ; 1278.13,4444.22 v1(1279.99,4492.29) ; 1279.99,4447.29 v1(1279.99,4492.29) ; 1279.99,4447.29 1270.05,4491.18 1279.99,4447.29 ; 1279.99,4447.29 1289.93,4491.18 1279.99,4447.29 ; 1279.99,4447.29 v1(1279.99,4492.29) ; v1(1279.99,4492.29) 1319.04,4524.58 ; v1(1279.99,4492.29) 1321.87,4525.34 ; v1(1279.99,4492.29) 1317.56,4525.64 ; v1(1279.99,4492.29) 1318.63,4524.28 ; v1(1279.99,4492.29) 1319.33,4528.52 ; v1(1279.99,4492.29) 1281.85,4444.22 ; v1(1279.99,4492.29) 1286.75,4492.29 1340.46,4546 1532,4546 ; 1318.63,4524.28 1274.41,4500.6 1319.04,4524.58 ; 1532,4546 1557.63,4571.63 C102.1@1557.63,4589.29 1580.41,4612.07 ; C104.1@1552.63,5099.29 1552.73,5148.98 ; C104.1@1552.63,5099.29 1676.71,5099.29 1730.86,5045.14 U5.28@1819.15,5045.14 ; C102.1@1559.6,4589.29 1580.41,4612.07 ; C102.1@1559.6,4589.29 1617.72,4612.07 ; C102.1@1559.6,4589.29 1580.41,4612.07 ; 1580.41,4612.07 1572.49,4582.25 1580.41,4612.07 ; 1580.41,4612.07 1551.43,4601.5 1580.41,4612.07 ; U5.28@1819.15,5045.14 1818.21,5046.08 1909.92,5046.08 ; 1909.92,5046.08 v1(1931,5012) 1931,5025 1909.92,5046.08 ; C100.1@2368,4385.43 2390.57,4385.43 ; C100.1@2368,4385.43 2390.57,4385.43 ; 2390.57,4385.43 2372.78,4371.55 2390.57,4385.43 ; 2390.57,4385.43 2372.78,4399.32 2390.57,4385.43 ; 2390.57,4385.43 v1(2438,4338) 2401.79,4374.21 ; 2489.97,3328.03 2518,3300 2672,3300 R53.1@2719.53,3347.53 ; C98.1@2676.89,5114.72 2686.77,5084.51 ; C98.1@2676.89,5114.72 2686.77,5084.51 ; C98.1@2676.89,5114.72 2686.77,5084.51 ; 2686.68,5165.69 v1(2686.77,5116.29) ; 2686.77,5084.51 v1(2686.77,5116.29) ; 2686.77,5084.51 C98.1@2696.64,5114.72 ; 2686.77,5084.51 v1(2686.77,5116.29) ; 2686.77,5084.51 C98.1@2696.64,5114.72 ; 2686.77,5084.51 v1(2686.77,5116.29) ; 2686.77,5084.51 C98.1@2696.64,5114.72 ; 2686.77,5084.51 v1(2686.77,5116.29) ; v1(2686.77,5116.29) 2686.86,5165.69 ; 2688.77,3325.8 v1(2724,3365) ; 2691.17,3326.38 v1(2724,3365) ; 2693.64,3326.51 v1(2724,3365) ; 2693.9,3318.76 v1(2724,3365) ; 2694.89,3322.89 v1(2724,3365) ; 2694.89,3322.89 2715.26,3369.86 2695.15,3323.49 ; 2695.15,3323.49 v1(2724,3365) ; R53.1@2719.53,3347.53 v1(2724,3365) ; R53.1@2719.53,3347.53 2714,3364.7 R53.1@2719.53,3347.53 ; R53.1@2719.53,3347.53 2732.62,3359.93 R53.1@2719.53,3347.53 ; R53.1@2719.53,3347.53 v1(2724,3365) ; C112.2@4343.41,5152.3 4418.33,5170.3 ; C112.2@4343.41,5152.3 4343.41,5274.41 v1(4354,5285) 4343.41,5234.04 ; C112.2@4343.41,5152.3 4353.3,5152.3 4371.3,5170.3 4762.3,5170.3 4781.66,5150.93 ; 4719.3,5119.3 IC1.16@4781.66,5119.3 4781.66,5150.93 ; R65.2@6753.52,5127.7 6770.28,5110.32 ; R65.2@6753.52,5127.7 6770.28,5110.32 ; R65.2@6753.52,5127.7 6770.28,5110.32 ; R65.2@6753.52,5127.7 6770.28,5110.32 ; v1(6762,5133) 6770.28,5110.32 ; v1(6762,5133) 6770.28,5110.32 ; v1(6762,5133) 6770.28,5110.32 ; v1(6762,5133) R65.2@6778.78,5135.53 ; v1(6762,5133) 6770.28,5110.32 ; v1(6762,5133) 6793.58,5091.93 ; v1(6762,5133) 6790.85,5093.71 ; v1(6762,5133) 6789.55,5092 ; 6770.28,5110.32 R65.2@6771.9,5134.41 ; 6770.28,5110.32 R65.2@6771.9,5134.41 ; 6770.28,5110.32 R65.2@6771.9,5134.41 ; 6770.28,5110.32 R65.2@6771.9,5134.41 ; 6770.28,5110.32 R65.2@6778.78,5135.53 ; 6770.28,5110.32 6797.3,5083.3 ; 6795.48,3680.48 6952.11,3680.48 ; 6797.3,5083.3 6951.3,5083.3 6982,5114 ; 6802.72,4367.3 6835.4,4399.98 6870.98,4399.98 6872.3,4401.3 6943.3,4401.3 ; 6810.3,5302.3 6940.66,5302.3 ; 6810.83,3269.48 6941.11,3269.48 ; 6810.83,3480.48 6949.11,3480.48 ; 6812.48,3053.48 6908.23,3053.48 6909.42,3052.3 6940.93,3052.3 ; 6940.93,3052.3 R48.2@6987.8,3027.62 ; 6941.11,3269.48 R32.2@6988.08,3243.39 ; 6942.74,3049.46 v1(6981,3012) ; 6942.97,3051.22 v1(6981,3012) ; 6943.3,4401.3 R60.2@6966.39,4362.22 ; 6944.26,4399.66 v1(6982,4362) ; 6944.26,4399.66 6988.37,4369.71 6945.88,4398.37 ; 6944.63,3048.18 v1(6981,3012) ; 6944.82,3049.18 v1(6981,3012) ; 6944.94,3048.28 v1(6981,3012) ; 6945.08,3263.08 v1(6983,3225) ; 6945.59,4399.53 v1(6982,4362) ; 6945.88,4398.37 v1(6982,4362) ; 6946.19,4398.4 v1(6982,4362) ; 6946.57,3266.45 v1(6983,3225) ; 6946.71,5311.69 v1(6983,5350) ; 6947.91,3261.66 v1(6983,3225) ; 6948.29,3263.5 v1(6983,3225) ; 6948.45,3262.14 v1(6983,3225) ; 6949.03,5309.01 v1(6983,5350) ; 6949.11,3480.48 v1(6986,3445) ; 6949.11,3480.48 R47.2@6992.19,3452.85 ; 6949.11,3480.48 R47.2@6978.4,3438.5 ; 6949.11,3480.48 v1(6986,3445) ; 6949.11,3480.48 R47.2@6992.19,3452.85 ; 6949.11,3480.48 R47.2@6978.4,3438.5 ; 6949.11,3480.48 v1(6986,3445) ; 6949.11,3480.48 R47.2@6992.19,3452.85 ; 6949.11,3480.48 R47.2@6978.4,3438.5 ; 6949.11,3480.48 R47.2@6968.81,3435.77 ; 6949.33,3480.25 v1(6986,3445) ; 6949.33,3480.25 R47.2@6992.19,3452.86 ; 6949.33,3480.25 R47.2@6978.39,3438.51 ; 6949.36,3480.23 v1(6986,3445) ; 6949.36,3480.23 R47.2@6992.19,3452.86 ; 6949.36,3480.23 R47.2@6978.39,3438.51 ; 6949.85,5312.49 v1(6983,5350) ; 6950.12,5311.76 v1(6983,5350) ; 6952.11,3680.48 v1(6983,3641) ; 6952.11,3680.48 R31.2@6990.22,3647.92 ; 6952.11,3680.48 R31.2@6974.55,3635.65 ; 6952.11,3680.48 v1(6983,3641) ; 6952.11,3680.48 R31.2@6990.22,3647.92 ; 6952.11,3680.48 R31.2@6974.55,3635.65 ; 6952.18,3680.41 v1(6983,3641) ; 6952.18,3680.41 R31.2@6990.22,3647.92 ; 6952.31,3680.15 v1(6983,3641) ; 6952.31,3680.15 R31.2@6974.55,3635.65 ; 6952.73,3679.78 v1(6983,3641) ; 6952.73,3679.78 R31.2@6990.22,3647.92 ; 6956.18,5095.52 v1(6982,5140) ; 6958.7,4200.3 v1(6983,4176) ; 6958.7,4200.3 R72.2@6988.97,4184.02 ; 6958.7,4200.3 R72.2@6974.98,4170.03 ; 6958.7,4200.3 v1(6983,4176) ; 6958.7,4200.3 R72.2@6988.97,4184.02 ; 6958.7,4200.3 R72.2@6974.98,4170.03 ; 6958.7,4200.3 v1(6983,4176) ; 6958.7,4200.3 R72.2@6988.97,4184.02 ; 6958.7,4200.3 R72.2@6974.98,4170.03 ; 6958.7,4200.3 R72.2@6988.97,4184.02 ; 6958.7,4200.3 R72.2@6974.98,4170.03 ; 6958.7,4200.3 v1(6983,4176) ; 6958.7,4200.3 R72.2@6988.97,4184.02 ; 6958.7,4200.3 R72.2@6974.98,4170.03 ; 6958.7,4200.3 v1(6983,4176) ; 6958.88,5098.3 v1(6982,5140) ; 6960.52,5093.75 v1(6982,5140) ; 6960.87,5097.81 v1(6982,5140) ; R59.2@6963.26,5133.41 v1(6982,5140) ; R59.2@6963.26,5133.41 6976.41,5148.29 R59.2@6963.26,5133.41 ; R59.2@6963.26,5133.41 6982.84,5130.04 R59.2@6963.26,5133.41 ; R59.2@6963.26,5133.41 v1(6982,5140) ; R59.2@6963.26,5133.41 6982,5114 ; R59.2@6963.26,5133.41 6982,5114 ; R60.2@6966.39,4362.22 v1(6982,4362) ; R47.2@6968.81,3435.77 v1(6986,3445) ; R59.2@6972.19,5138.08 6982,5114 ; R59.2@6972.19,5138.08 6982,5114 ; R59.2@6972.19,5138.08 6982,5114 ; R59.2@6972.19,5138.08 6982,5114 ; R59.2@6972.19,5138.08 6982,5114 ; R59.2@6972.19,5138.08 6982,5114 ; R59.2@6972.19,5138.08 6982,5114 ; R59.2@6972.19,5138.08 6982,5114 ; R59.2@6972.19,5138.08 6982,5114 ; R59.2@6972.19,5138.08 6982,5114 ; R59.2@6972.19,5138.08 6982,5114 ; v1(6981,3012) R48.2@6987.8,3027.62 ; 6982,5114 v1(6982,5140) ; 6982,5114 R59.2@6991.81,5138.08 ; 6982,5114 v1(6982,5140) ; 6982,5114 R59.2@6991.81,5138.08 ; 6982,5114 v1(6982,5140) ; 6982,5114 R59.2@6991.81,5138.08 ; 6982,5114 v1(6982,5140) ; 6982,5114 R59.2@6991.81,5138.08 ; 6982,5114 v1(6982,5140) ; 6982,5114 R59.2@6991.81,5138.08 ; 6982,5114 v1(6982,5140) ; 6982,5114 R59.2@6991.81,5138.08 ; 6982,5114 v1(6982,5140) ; 6982,5114 R59.2@6991.81,5138.08 ; 6982,5114 v1(6982,5140) ; 6982,5114 R59.2@6991.81,5138.08 ; 6982,5114 v1(6982,5140) ; 6982,5114 R59.2@6991.81,5138.08 ; 6982,5114 v1(6982,5140) ; 6982,5114 R59.2@6991.81,5138.08 ; 6982,5114 R59.2@6991.81,5138.08 ; 6982,5114 R59.2@6980.3,5140.93 6982,5114 ; 6982,5114 6971.89,5139.01 6982,5114 ; 6982,5114 6988.88,5140.09 6982,5114 ; 6982,5114 R59.2@6998.14,5135.62 ; 6982,5114 R59.2@6998.14,5135.62 ; 6982,5114 v1(6982,5140) ; v1(6982,5140) R59.2@6998.14,5135.62 ; v1(6982,5140) R59.2@6998.14,5135.62 ; v1(6983,3225) R32.2@6988.08,3243.39 ; R59.2@6998.14,5135.62 6982.38,5130.01 R59.2@6998.14,5135.62 ; R59.2@6998.14,5135.62 6987.39,5148.43 R59.2@6998.14,5135.62
  Top Layer w20: C115.2@5069.98,4759.95 5158.08,4759.95 ; C115.2@5075.89,4759.95 5158.08,4759.95 ; C115.2@5077.02,4773.52 5158.08,4759.95 ; 5143.43,4759.95 v1(5068,4764) ; 5143.76,4759.95 v1(5068,4764) ; 5147.85,4761.66 v1(5068,4764) ; C6.1@5255.39,2375.46 C9.2@5264.43,2283.85 ; C6.1@5256,2369.96 C9.2@5288.16,2283.57 ; C9.2@5262.69,2273.31 C6.1@5276.27,2355.82 ; C9.2@5265.24,2252.4 L1.1@5323.41,2183.67 ; C9.2@5266.19,2251.22 L1.1@5332.93,2187.97 ; C9.2@5276.27,2272.2 C6.1@5276.27,2355.82 ; C6.1@5282.18,2372.3 5276.27,2366.39 C9.2@5276.27,2266.3 5345.17,2197.4 ; C9.2@5287.59,2267.97 L1.1@5332.93,2187.97 ; C9.2@5288.38,2266.62 L1.1@5323.41,2183.67 ; C9.2@5289.85,2273.31 C6.1@5276.27,2355.82 ; C6.1@5297.7,2369.69 C9.2@5264.43,2283.85 ; C6.1@5298.38,2375.19 C9.2@5288.16,2283.57 ; 5301.12,2231.4 v1(5345.17,2163.3) ; 5303.58,2237.38 v1(5345.17,2163.3) ; 5305.36,2230.25 v1(5345.17,2163.3) ; L1.1@5331.95,2172.49 5345.17,2197.4 ; L1.1@5333.26,2162.58 C9.2@5292.32,2250.25 ; L1.1@5356.03,2177.43 C9.2@5292.32,2250.25 ; L1.1@5358.39,2172.49 5345.17,2197.4 ; C114.2@5476.02,4759.95 5591.08,4759.95 ; C114.2@5478.13,4759.95 5561.76,4759.95 ; C114.2@5479.24,4746.37 5561.76,4759.95 ; 5553.9,4758.66 v1(5476.02,4756.02) ; IC3.8@5608.22,4712.05 5608.22,4742.81 5591.08,4759.95 ; IC3.8@5608.22,4745.05 5591.08,4759.95 ; C113.2@5884.32,4759.95 5967.94,4759.95 ; C113.2@5885.43,4746.37 5967.94,4759.95 ; C113.2@5885.43,4773.52 5967.94,4759.95 ; 5953.41,4759.95 v1(5878.41,4759.95) ; R109.1@6168.53,4962.33 6182.01,5008.01 ; R109.1@6182.01,4960.39 6182.01,5008.01 ; R109.1@6195.5,4962.33 6182.01,5008.01 ; v1(6762,5133) 6765.93,5136.93 R65.2@6770.28,5136.93 ; v1(5068,4764) 5077.02,4746.37 5158.08,4759.95 ; v1(5068,4764) 5158.08,4759.95 ; 5158.08,4759.95 IC4.8@5199.72,4712.05 5199.72,4718.31 5158.08,4759.95 ; C9.2@5264.43,2283.85 C6.1@5276.88,2375.06 ; C9.2@5276.27,2283.56 C6.1@5276.88,2375.06 ; C9.2@5276.27,2283.56 5255.52,2372.68 C9.2@5276.27,2283.56 ; C9.2@5276.27,2283.56 5298.21,2372.4 C9.2@5276.27,2283.56 ; C9.2@5276.27,2283.56 C6.1@5276.88,2375.06 ; C6.1@5276.88,2375.06 C9.2@5288.16,2283.57 ; C9.2@5292.32,2250.25 5345.17,2169.2 5345.17,2197.4 ; L1.1@5323.41,2183.67 5276.27,2260.39 L1.1@5332.93,2187.97 ; v1(5345.17,2163.3) 5345.17,2197.4 ; v1(5345.17,2163.3) 5345.17,2197.4 ; v1(5345.17,2163.3) 5345.17,2197.4 ; v1(5476.02,4756.02) 5551.42,4759.95 v1(5476.02,4756.02) ; v1(5476.02,4756.02) 5479.24,4773.53 5561.76,4759.95 ; v1(5476.02,4756.02) 5561.76,4759.95 ; v1(5878.41,4759.95) 5967.94,4759.95 ; v1(5878.41,4759.95) 5967.94,4759.95 ; v1(5878.41,4759.95) 5981.08,4759.95 ; 5981.08,4759.95 IC2.8@6016.72,4712.05 6016.72,4724.31 5981.08,4759.95 ; v1(6182.02,4963.02) 6182.01,5008.01 ; v1(6182.02,4963.02) 6182.01,5008.01 ; v1(6182.02,4963.02) 6182.01,5008.01 ; 6182.01,5008.01 6217.35,5043.35 6504.41,5043.35 6588.76,4959 ; 6588.76,4959 v1(6663,4959) 6588.76,4959
  Bottom Layer w10: v1@86.06,3821.11 96,3865 v1@105.94,3821.11 ; v1@86.12,3818.45 98,3774.87 ; v1@88.06,3367.78 98,3411.67 v1@107.94,3367.78 ; v1@88.06,3600.89 98,3557 v1@107.94,3600.89 ; v1@88.06,3603.11 98,3647 v1@107.94,3603.11 ; v1@88.18,3364.77 101.67,3321.36 ; v1@91.73,3133.78 101.67,3177.67 v1@111.6,3133.78 ; v1@101.36,5384.88 111.29,5340.99 v1@121.23,5384.88 ; v1(101.67,3132.67) 101.67,3370.33 v1(98,3366.67) ; v1@104.01,5191.51 111.29,5236.25 ; v1@104.06,5189.89 114,5146 ; v1@105.04,4580.89 114,4625.03 ; v1@105.06,4578.89 115,4535 v1@124.94,4578.89 ; v1@105.98,3819.33 98,3774.87 ; v1@108,3366.37 101.67,3321.36 ; v1(111.29,5385.99) 111.29,5193.71 v1(114,5191) ; v1@123.86,5192.69 111.29,5236.25 ; v1@123.94,5189.89 114,5146 ; v1@124.91,4581.33 114,4625.03 ; v1@188.06,4102.11 198,4146 v1@207.94,4102.11 ; v1@190.27,4107.35 161.79,4064.79 ; v1@197.06,2739.11 207,2783 v1@216.94,2739.11 ; v1@199.02,2858.33 207,2813.88 ; v1@200.2,4321.26 175.68,4282.68 ; v1@200.27,4308.65 171.79,4351.21 ; v1@201.17,2852.78 178,2890 ; v1@204.35,4093.27 161.79,4064.79 ; v1@205.89,2728.06 162,2738 v1@205.89,2747.94 ; v1@206.51,2494.41 162.62,2504.35 v1@206.51,2514.29 ; v1@207,2857 v1(207,2738) 161,2738 139,2716 139,2518 152.65,2504.35 v1(207.62,2504.35) ; v1@214.26,4307.2 175.68,4282.68 ; v1@214.35,4322.73 171.79,4351.21 ; v1@215.22,2866.83 178,2890 ; v1@218.88,2857.45 207,2813.88 ; v1@319.89,3123.06 276,3133 v1@319.89,3142.94 ; v1(321,3133) 242.4,3133 240,3130.6 240,3122.26 217.74,3100 209.4,3100 178,3068.6 178,2890 ; v1@1043.65,2530.73 1086.21,2559.21 v1@1057.73,2516.65 ; v1(1050,2523) 1133,2606 1133,4345.31 v1(1279.99,4492.29) 1432.28,4340 2436,4340 v1(2438,4338) ; v1@1272.26,4498.64 1243.77,4456.08 v1@1286.33,4484.57 ; v1@1273.64,4484.57 1316.2,4456.08 v1@1287.72,4498.64 ; v1@1828.06,4537.11 1838,4581 v1@1847.94,4537.11 ; v1(1838,4536) 1838,4958 1892,5012 ; v1@1929.72,5002.08 1892,5012 ; v1@1929.72,5021.92 1892,5012 ; v1@1932.11,5002.06 1976,5012 v1@1932.11,5021.94 ; v1@2089,5043 2072,5012 ; v1@2090.98,5044.99 2134.5,5071.5 ; v1@2103,5029 2072,5012 ; v1@2104.46,5030.34 2134.5,5071.5 ; v1@2436.45,4328.12 2392.85,4340 ; v1@2437.33,4347.98 2392.85,4340 ; v1@2439.11,4328.06 2483,4338 v1@2439.11,4347.94 ; v1@2685.66,5106.36 2641.77,5116.29 v1@2685.66,5126.23 ; v1@2687.88,5106.36 2731.77,5116.29 v1@2687.88,5126.23 ; v1@2714.06,3366.11 2724,3410 v1@2733.94,3366.11 ; v1(2724,3365) 2724,3439 2602,3561 2602,3862 2577.41,3886.59 2577.41,4187.59 ; J2.1@3075.63,4239.09 3045.76,4183.17 ; J2.1@3084.09,4233.67 3045.76,4183.17 ; J2.1@3096.26,4221.5 3045.76,4183.17 ; J2.1@3101.68,4213.04 3045.76,4183.17 ; v1@4351.04,5294.55 4301.61,5274 ; v1@4355.13,5275.06 4301.61,5274 ; v1(96,3820) 98,3774.87 ; v1(96,3820) 98,3818 v1(98,3602) v1(98,3366.67) ; v1(96,3820) 96,3999 v1(198,4101) ; v1(98,3366.67) 101.67,3321.36 ; 111.29,5236.25 v1(114,5191) ; 114,4625.03 v1(115,4580) ; 114,5146 v1(114,5191) ; v1(114,5191) 114,5133.18 101.33,5120.51 101.33,4848.07 114,4835.4 114,4581 v1(115,4580) ; v1(115,4580) 115,4408 v1(208,4315) ; 161.79,4064.79 v1(198,4101) ; 171.79,4351.21 v1(208,4315) ; 175.68,4282.68 v1(208,4315) ; 175.68,4282.68 175.68,4225.26 198,4202.94 v1(198,4101) ; 175.68,4282.68 v1(208,4315) ; 178,2890 v1(209,2859) 207,2813.88 ; 1892,5012 v1(1931,5012) ; 1892,5012 v1(1931,5012) ; v1(1931,5012) 2072,5012 ; 2072,5012 v1(2097,5037) ; v1(2097,5037) 2134.5,5071.5 ; v1(2097,5037) 2100,5037 2179.29,5116.29 v1(2686.77,5116.29) 2772.11,5116.29 2802.4,5086 3395.42,5086 3569.42,5260 3843.82,5260 3857.82,5274 4343,5274 v1(4354,5285) 4301.61,5274 ; 2392.85,4340 v1(2438,4338) ; v1(2438,4338) 2532,4338 2577.41,4292.59 2577.41,4187.59 ; 2577.41,4187.59 2598,4167 3029.59,4167 J2.1@3090.59,4228 3045.76,4183.17
  Bottom Layer w20: 4743.03,4962 v1(4668,4963) 4669,4962 v1@6182.02,4962 ; 5143.03,4763 v1(5068,4764) 5069,4763 v1@5888,4763 ; 5292.73,4962 v1(5368.02,4965.02) 5443.3,4962 ; v1(5345.17,2163.3) 5259,2077.13 5259,859 5427,691 6705.11,691 6761.46,747.35 6761.46,2489.46 6971.23,2699.23 ; 5399.58,4763 v1(5476.02,4756.02) 5552.46,4763 ; 5703.72,4962 v1(5779.02,4965.02) 5854.29,4962 ; 5803.23,4763 v1(5878.41,4759.95) 6133.95,4759.95 6182.02,4808.02 v1(6182.02,4963.02) 6106.98,4962 ; 6728.59,5010.59 v1(6663,4959) 6677,4959 6764,5046 v1@6764,5119 ; v1(6762,5133) 6764,5057.07 ; v1@6981.3,3000.56 v1(6981,2925) ; 6983,2813.68 v1(6971.23,2729.77) ; 6983,2849.89 v1(6981,2925) ; v1@6983,2936.88 v1(6981,3012) 6983,3087.13 ; v1@6983,3000.13 v1(6981,2925) ; 6983,3369.72 v1(6986,3445) 6983,3520.29 ; 6983,4286.97 v1(6982,4362) 6983,4437.03 ; 6983,5064.97 v1(6982,5140) 6983,5215.03 ; v1(6983,5350) 6983,2741.54 v1(6971.23,2729.77) ; 6971.23,2699.23 v1(6971.23,2729.77) ; 6971.23,2699.23 v1(6971.23,2729.77)
  other v1: 6983,3949
+5V_S: C4.1 C7.1 C8.1 C10.2 C11.2 C13.2 C14.2 C53.1 C68.2 C79.2 C80.2 C81.2 J13.1 J13.2 J13.3 J13.4 J17.4 L2.1 L3.1 R2.1 U2.3 U3.5 U4.2 U4.3 | length 26652
  Top Layer w20: v3(6053.02,3992.98) C8.1@6053.02,3995 ; C79.2@6291.7,4322.41 C79.2@6309.9,4340.61 ; C79.2@6293.85,4343.83 C80.2@6384.41,4340.61 ; C79.2@6295.64,4322.41 C80.2@6384.41,4340.61 ; C79.2@6302.43,4302.02 C80.2@6384.41,4340.61 ; C80.2@6383.11,4327.47 6384.41,4416.07 ; 6384.41,4387.05 U4.2@6384.41,4459.05 ; U4.2@6384.41,4492.05 C80.2@6384.41,4340.61 ; C80.2@6386,4341.07 C79.2@6305.87,4303.64 ; C80.2@6387.38,4315.13 C79.2@6305.53,4343.42 ; C80.2@6387.64,4315.07 C79.2@6309.9,4340.61 ; C80.2@6389.08,4341.83 C79.2@6303.87,4324.1 ; C80.2@6390.39,4314.7 C79.2@6303.87,4324.1 ; C80.2@6391.72,4341.91 C79.2@6309.9,4340.61 ; C80.2@6392.11,4341.88 C79.2@6305.53,4343.42 ; C80.2@6393.51,4338.45 6434.41,4366.03 ; C80.2@6393.58,4314.98 C79.2@6305.87,4303.64 ; C80.2@6402.61,4328.32 6434.41,4366.03 ; C80.2@6410.01,4331.24 6384.41,4416.07 ; C80.2@6414.14,4321.06 6434.41,4366.03 ; 6434.41,4387.05 U4.3@6434.41,4459.05 ; U4.3@6434.41,4492.05 6434.41,4366.03 ; C79.2@6303.87,4324.1 C80.2@6390.8,4328.32 ; C79.2@6305.53,4343.42 C80.2@6390.8,4328.32 ; C79.2@6305.87,4303.64 C80.2@6390.8,4328.32 ; C79.2@6309.9,4340.61 C80.2@6390.8,4328.32 ; C79.2@6309.9,4340.61 C80.2@6384.41,4340.61 ; 6384.41,4416.07 C80.2@6396.7,4328.32 6434.41,4366.03
  Top Layer w30: 6160.76,4279.76 v3(6082,4179) 6082,4201 6203.41,4322.41 ; C79.2@6286.15,4306 6203.41,4322.41 ; C79.2@6286.15,4338.83 6203.41,4322.41 ; C79.2@6287.77,4322.41 6203.41,4322.41 ; C10.2@5617.96,2838.93 5715.72,2838.93 5623.87,2838.93 C14.2@5721.63,2838.93 ; C10.2@5617.96,2838.93 5520.2,2838.93 5612.06,2838.93 C11.2@5514.3,2838.93 C10.2@5617.96,2838.93 ; C10.2@5617.96,2838.93 C14.2@5721.63,2838.93 ; C14.2@5721.63,2838.93 5819.39,2838.93 5727.53,2838.93 C13.2@5825.29,2838.93 C14.2@5721.63,2838.93 ; 6203.41,4322.41 C79.2@6291.7,4322.41 ; C79.2@6291.7,4322.41 C80.2@6390.8,4328.32 ; C79.2@6291.7,4322.41 C80.2@6390.8,4322.41 ; C80.2@6390.8,4322.41 6295.64,4322.41 C80.2@6390.8,4328.32 ; C80.2@6390.8,4322.41 6297.07,4305.98 C80.2@6390.8,4328.32 ; C80.2@6390.8,4322.41 6297.07,4338.85 C80.2@6390.8,4328.32 ; C80.2@6390.8,4322.41 C80.2@6396.7,4328.32 ; C80.2@6396.7,4328.32 6489.8,4328.32 6402.61,4328.32 C81.2@6495.7,4328.32 C80.2@6396.7,4328.32
  Top Layer w50: J17.4@89,1889 246,1889 517,1618 3412,1618 3775.66,1254.34 J13.1@3775.66,449.43 ; C7.1@4906.17,2496.92 U2.3@4945.74,2335.34 ; C7.1@4906.28,2496.33 U2.3@4945.74,2356.01 ; C7.1@4910.31,2531.51 4979,2610 ; C7.1@4932.02,2509 4932.02,2563.02 4979,2610 ; C7.1@4932.02,2516.87 4979,2610 ; 4934.3,2141.49 U2.3@4945.74,2314.67 ; C7.1@4956.69,2508.11 4979,2610 ; C4.1@5270.88,2025.06 v3(5170,2007.3) ; C4.1@5270.88,2029 5249.18,2007.3 v3(5170,2007.3) ; R2.1@5499.36,2646.95 5415.97,2646.95 ; R2.1@5503.3,2662.04 C11.2@5514.3,2838.93 5503.3,2827.93 R2.1@5503.3,2646.95 5415.97,2646.95 ; U3.5@5777.84,3490.9 5777.84,3549.82 6052.25,3824.22 ; C13.2@5825.29,2838.93 5863,2838.93 ; C8.1@6033.01,3970.23 6136.25,3868.3 ; C8.1@6075.73,4000.15 6136.25,3868.3 ; L3.1@6248.75,3201.09 6432.94,3055.83 ; L3.1@6248.75,3272.31 6432.94,3417.57 ; L3.1@6325.11,3209.24 6432.94,3417.57 ; L3.1@6325.11,3264.15 6432.94,3055.83 ; L2.1@6433.4,2543.31 6482.89,2762.59 ; 6442.3,3688.4 C68.2@6446.93,3862.39 ; L2.1@6446.93,2503.34 6379.89,2609.3 ; L2.1@6502.6,2583.53 6379.89,2609.3 ; L2.1@6532.39,2543.31 6482.89,2762.59 ; U2.3@4945.74,2335.34 4932.02,2501.13 U2.3@4945.74,2356.01 ; U2.3@4945.74,2335.34 4958.2,2501.23 U2.3@4945.74,2356.01 ; U2.3@4945.74,2335.34 4945.74,2509 U2.3@4945.74,2356.01 ; U2.3@4945.74,2335.34 4934.3,2323.89 4934.3,2035.36 4962.36,2007.3 v3(5170,2007.3) ; 4979,2610 5379.02,2610 5415.97,2646.95 ; 5863,2838.93 5831.2,2838.93 5863,2838.93 ; 5863,2838.93 5993.58,2969.51 6099.66,2969.51 6118.99,2950.18 6118.99,2948.6 6127.3,2940.3 6127.3,2694.3 6212.3,2609.3 6379.89,2609.3 ; 6052.25,3824.22 v3(6053.02,3992.98) ; 6052.25,3824.22 v3(6053.02,3992.98) ; 6052.25,3824.22 v3(6053.02,3992.98) ; 6052.25,3824.22 v3(6053.02,3992.98) ; 6052.25,3824.22 6053.02,3987.13 6136.25,3868.3 ; 6052.25,3824.22 6026.91,3985.15 v3(6053.02,3992.98) ; 6052.25,3824.22 6079.1,3984.9 v3(6053.02,3992.98) ; 6052.25,3824.22 C8.1@6052.25,3952.3 ; C8.1@6052.25,3952.3 v3(6053.02,3992.98) ; C8.1@6052.25,3952.3 v3(6053.02,3992.98) ; C8.1@6052.25,3952.3 6136.25,3868.3 ; v3(6053.02,3992.98) 6136.25,3868.3 ; v3(6053.02,3992.98) 6136.25,3868.3 ; v3(6053.02,3992.98) 6136.25,3868.3 ; v3(6053.02,3992.98) 6136.25,3868.3 ; 6136.25,3868.3 C68.2@6446.93,3868.3 ; 6379.89,2609.3 6482.89,2537.79 6482.89,2762.59 ; 6379.89,2609.3 L2.1@6482.89,2506.3 6482.89,3005.87 L3.1@6252.07,3236.7 6442.3,3426.93 6442.3,3863.67 C68.2@6446.93,3868.3 ; 6432.94,3055.83 6283.56,3236.7 6432.94,3417.57 ; C68.2@6446.93,3868.3 C68.2@6450.78,3872.15 ; C68.2@6450.78,3872.15 6450.78,3977.48 6446.93,3874.2 C53.1@6450.78,3981.42 C68.2@6450.78,3872.15
  Bottom Layer w30: v3(6053.02,3992.98) 6053.02,4150.02 v3(6082,4179)
  Bottom Layer w50: J13.3@3696.92,449.43 3696.92,579.92 3804.11,687.11 4004.11,687.11 3775.66,458.66 J13.1@3775.66,449.43 ; 3900.73,583.73 J13.1@3775.66,449.43 ; 4013.34,687.11 5145.99,687.11 5216,757.12 5216,1961.3 v3(5170,2007.3) ; J13.2@3775.66,370.69 J13.4@3696.92,370.69 J13.2@3775.66,370.69 ; J13.2@3775.66,370.69 J13.1@3775.66,449.43